# EAGLE board ninja star (EAGLE 9.5.2)
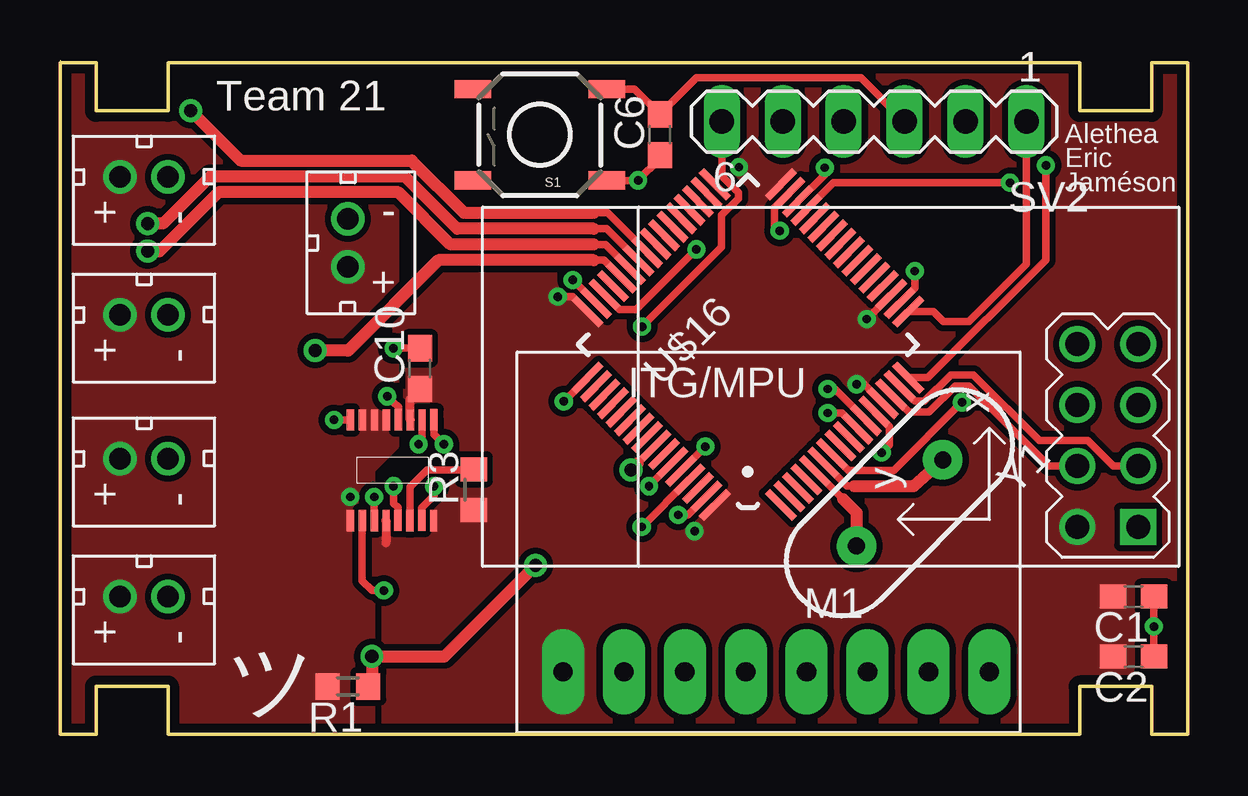
[diagram p0: board, top side]
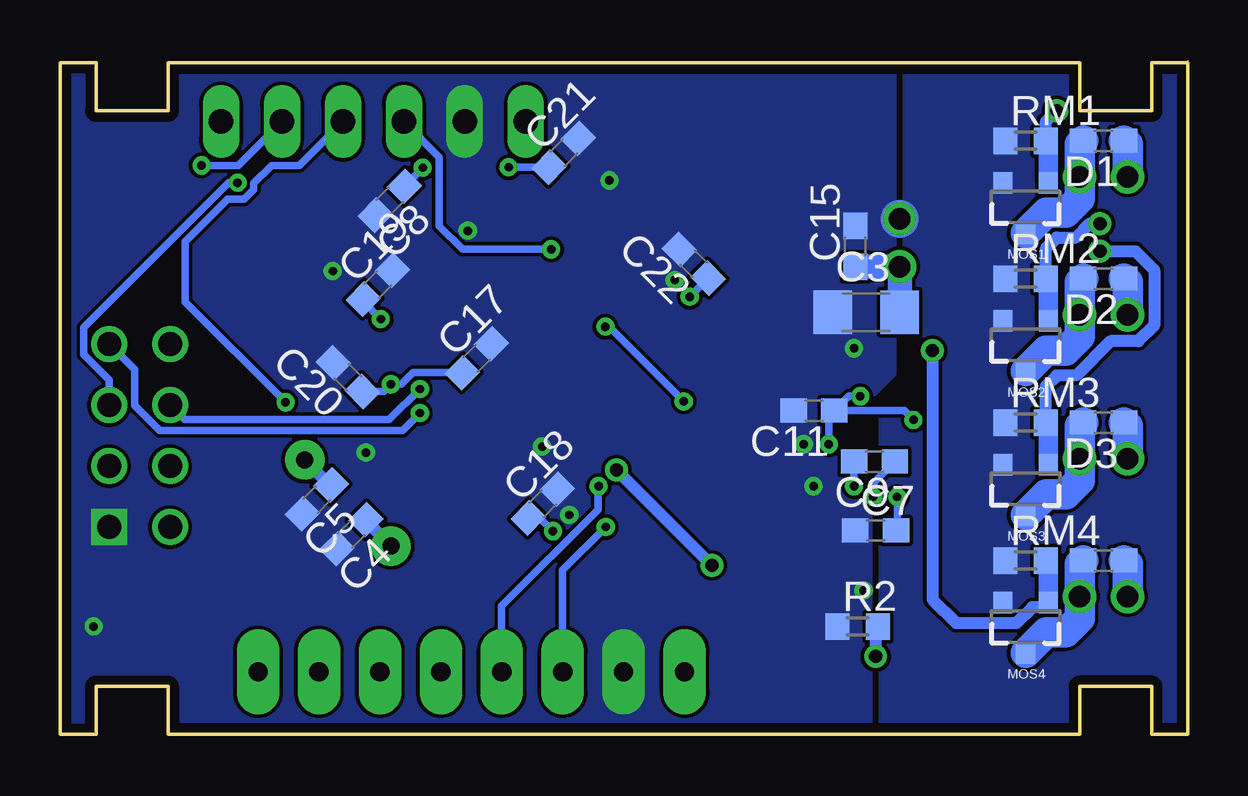
[diagram p1: board, bottom side, seen from below]

Size 47 x 28.12 mm. Coordinates in mm from the lower left corner, seen from the top.
Outline: 45.5,0 46.61,0
Outline: 0,28.12 0,28
Outline: 45.5,0 45.5,2 42.5,2 42.5,0 4.5,0 4.5,2 1.5,2 1.5,0 0,0 0,28
Outline: 0,28 1.5,28 1.5,26 4.5,26 4.5,28 42.5,28 42.5,26 45.5,26 45.5,28 47,28 47,0 45.5,0
Copper layers (1*16): Top 0.035mm / dielectric 1.5mm / Bottom 0.035mm
Design rules "default *": minimum track width 6mil, minimum drill 0.35mm, track to track 6mil, track to pad 6mil, pad to pad 6mil, via to via 6mil, smd to smd 6mil, copper to edge 15mil, drill to drill 6mil, minimum pad ring 10mil, minimum via ring 8mil, stop-mask expansion 4mil, vias tented up to drill 0mil, thermal gap 10mil

## Footprints (pad centres in the part's own frame; a part is rotated, then mirrored left to right if it is on the bottom)
C0603 = smd 1.1 x 1: 1 -0.85,0; 2 0.85,0
C1206 = smd 1.6 x 1.8: 1 -1.4,0; 2 1.4,0
WIRELESS-NRF24L01 = drill 1 square: 1 -12.7,6.35 | drill 1: 2 -10.16,6.35; 3 -12.7,3.81; 4 -10.16,3.81; 5 -12.7,1.27; 6 -10.16,1.27; 7 -12.7,-1.27; 8 -10.16,-1.27
SOT23-3 = smd 0.8 x 0.9: 1 -0.95,-1; 2 0.95,-1; 3 0,1.1
JST_CONNECTOR_FEMALE = drill 0.889: + 0,1; - 0,-1
R0603 = smd 1 x 1.1: 1 -0.85,0; 2 0.85,0
TACTILE-SWITCH-SMD = smd 1.524 x 0.762: 1 -2.794,1.905; 2 2.794,1.905; 3 -2.794,-1.905; 4 2.794,-1.905
MA06-1 = drill 1.016 long: 1 -6.35,0; 2 -3.81,0; 3 -1.27,0; 4 1.27,0; 5 3.81,0; 6 6.35,0
GY-521 = drill 0.8 pad 1.778 long: ADO -8.89,-6.35; GND -8.89,6.35; INT -8.89,-8.89; SCL -8.89,3.81; SDA -8.89,1.27; VCC -8.89,8.89; XCL -8.89,-3.81; XDA -8.89,-1.27
MSOP-16 = smd 0.889 x 0.305: P$1 2.082,-0.902; P$2 2.081,0.087; P$3 2.081,1.078; P$4 -2.115,1.589; P$5 2.081,-1.397; P$6 -2.115,0.104; P$7 -2.111,-0.393; P$8 -2.111,-1.393; P$9 -2.111,1.096; P$10 -2.111,0.599; P$11 2.085,0.587; P$12 -2.112,-1.895; P$13 2.086,-1.897; P$14 2.082,1.574; P$15 2.081,-0.408; P$16 -2.111,-0.889
LQFP64 = smd 0.3 x 1.6: 1 -3.75,-5.7; 2 -3.25,-5.7; 3 -2.75,-5.7; 4 -2.25,-5.7; 5 -1.75,-5.7; 6 -1.25,-5.7; 7 -0.75,-5.7; 8 -0.25,-5.7; 9 0.25,-5.7; 10 0.75,-5.7; 11 1.25,-5.7; 12 1.75,-5.7; 13 2.25,-5.7; 14 2.75,-5.7; 15 3.25,-5.7; 16 3.75,-5.7; 33 3.75,5.7; 34 3.25,5.7; 35 2.75,5.7; 36 2.25,5.7; 37 1.75,5.7; 38 1.25,5.7; 39 0.75,5.7; 40 0.25,5.7; 41 -0.25,5.7; 42 -0.75,5.7; 43 -1.25,5.7; 44 -1.75,5.7; 45 -2.25,5.7; 46 -2.75,5.7; 47 -3.25,5.7; 48 -3.75,5.7 | smd 1.6 x 0.3: 17 5.7,-3.75; 18 5.7,-3.25; 19 5.7,-2.75; 20 5.7,-2.25; 21 5.7,-1.75; 22 5.7,-1.25; 23 5.7,-0.75; 24 5.7,-0.25; 25 5.7,0.25; 26 5.7,0.75; 27 5.7,1.25; 28 5.7,1.75; 29 5.7,2.25; 30 5.7,2.75; 31 5.7,3.25; 32 5.7,3.75; 49 -5.7,3.75; 50 -5.7,3.25; 51 -5.7,2.75; 52 -5.7,2.25; 53 -5.7,1.75; 54 -5.7,1.25; 55 -5.7,0.75; 56 -5.7,0.25; 57 -5.7,-0.25; 58 -5.7,-0.75; 59 -5.7,-1.25; 60 -5.7,-1.75; 61 -5.7,-2.25; 62 -5.7,-2.75; 63 -5.7,-3.25; 64 -5.7,-3.75
HC49US = drill 0.7 pad 1.651: 1 -2.54,0; 2 2.54,0

## Placement (x,y rotation side)
C1  100nF  [C0603]  44.75,5.75 180 top
C2  10uF  [C0603]  44.75,3.25 180 top
C3  100uF  [C1206]  13.4,17.6 0 bottom
C4  16pF  [C0603]  34.85,8.35 225 bottom
C5  16pF  [C0603]  36.3,9.8 225 bottom
C6  0.1uF  [C0603]  25,25 90 top
C7  10uF  [C0603]  13,8.5 0 bottom
C8  4.7uF  [C0603]  33.25,22.25 225 bottom
C9  2.2uF  [C0603]  13.05,11.38 180 bottom
C10  22uF  [C0603]  15,15.25 90 top
C11  10uF  [C0603]  15.57,13.5 180 bottom
C15  1uF  [C0603]  13.85,20.35 90 bottom
C17  4.7uF  [C0603]  29.62,15.68 45 bottom
C18  100nF  [C0603]  26.88,9.62 45 bottom
C19  100nF  [C0603]  33.75,18.75 45 bottom
C20  100nF  [C0603]  35,14.9 135 bottom
C21  100nF  [C0603]  26,24.25 45 bottom
C22  100nF  [C0603]  20.58,19.62 135 bottom
D1  DIODE  [C0603]  3.5,24.75 180 bottom
D2  DIODE  [C0603]  3.5,19 180 bottom
D3  DIODE  [C0603]  3.5,13 180 bottom
D4  DIODE  [C0603]  3.5,7.25 180 bottom
M1  WIRELESS-NRF24L01  [WIRELESS-NRF24L01]  32.25,15 180 top
MOS1  N-CHANNEL-MOSFET-IRLML6244TRPBF  [SOT23-3]  6.75,22 180 bottom
MOS2  N-CHANNEL-MOSFET-IRLML6244TRPBF  [SOT23-3]  6.75,16.25 180 bottom
MOS3  N-CHANNEL-MOSFET-IRLML6244TRPBF  [SOT23-3]  6.75,10.25 180 bottom
MOS4  N-CHANNEL-MOSFET-IRLML6244TRPBF  [SOT23-3]  6.75,4.5 180 bottom
MOTOR1  JST_CONNECTOR_FEMALE  [JST_CONNECTOR_FEMALE]  3.5,23.25 90 top
MOTOR2  JST_CONNECTOR_FEMALE  [JST_CONNECTOR_FEMALE]  3.5,17.5 90 top
MOTOR3  JST_CONNECTOR_FEMALE  [JST_CONNECTOR_FEMALE]  3.5,11.5 90 top
MOTOR4  JST_CONNECTOR_FEMALE  [JST_CONNECTOR_FEMALE]  3.5,5.75 90 top
R1  10kΩ  [R0603]  12,2 180 top
R2  10kΩ  [R0603]  13.75,4.5 0 bottom
R3  500k  [R0603]  17.25,10.2 90 top
RM1  10kΩ  [R0603]  6.75,24.75 0 bottom
RM2  10kΩ  [R0603]  6.75,19 0 bottom
RM3  10kΩ  [R0603]  6.75,13 0 bottom
RM4  10kΩ  [R0603]  6.75,7.25 0 bottom
S1  SWITCH-MOMENTARY-2SMD  [TACTILE-SWITCH-SMD]  20,25 180 top
SV2  [MA06-1]  33.94,25.55 180 top
U1  GY-521MPU6050  [GY-521]  29.85,11.5 90 top
U$7  JST_CONNECTOR_FEMALE  [JST_CONNECTOR_FEMALE]  12,20.5 180 top
U$12  VR-LTC3246  [MSOP-16]  14,11 270 top
U$16  STM32F411XC  [LQFP64]  28.68,16.25 45 top
Y1  [HC49US]  35,9.65 225 top

## Library data of the parts
C1-C11 C15 C17-C22 = rcl; SPICEPREFIX: C
D1-D4 RM1-RM4 U$12 Y1 = AP_quad_updated
M1 MOTOR1-MOTOR4 U1 U$7 = Aircopter_quad_lib
MOS1-MOS4 = Aircopter_quad_lib; DATASHEET: http://www.mouser.com/ds/2/196/irlml6244pbf-936666.pdf; MOUSER: 942-IRLML6244TRPBF; URL: http://www.mouser.com/Search/ProductDetail.aspx?R=IRLML6244TRPBFvirtualkey57370000virtualkey942-IRLML6244TRPBF
R1 R2 = rcl; SPICEPREFIX: R
R3 = AP_quad
S1 = Aircopter_quad_lib; PROD_ID: SWCH-08247
SV2 = con-lstb; OC_FARNELL: unknown; OC_NEWARK: unknown
U$16 = Aircopter_quad_lib (1)

## Nets
3.3V: C1.2 C2.2 C10.1 C17.1 C18.1 C19.1 C20.1 C21.1 C22.1 M1.2 R3.1 U1.VCC U$12.P$10 U$12.P$14 U$12.P$15 U$16.13 U$16.19 U$16.32 U$16.48 U$16.64
ANALOG: R1.1 R2.2 U$16.57
CAP: C9.2 U$12.P$2
CE: M1.3 U$16.15
CSN: M1.4 U$16.14
GND: C1.1 C2.1 C3.1 C4.2 C5.2 C6.1 C7.1 C8.2 C10.2 C11.2 C15.2 C17.2 C18.2 C19.2 C20.2 C21.2 C22.2 M1.1 MOS1.2 MOS2.2 MOS3.2 MOS4.2 R2.1 RM1.1 RM2.1 RM3.1 RM4.1 S1.1 SV2.5 U1.GND U$7.- U$12.P$3 U$12.P$4 U$12.P$5 U$16.12 U$16.18 U$16.31 U$16.47 U$16.60 U$16.63
MISO: M1.7 U$16.10
MOSI: M1.6 U$16.11
N$1: C9.1 U$12.P$1
N$2: D2.2 MOS2.3 MOTOR2.-
N$3: D1.2 MOS1.3 MOTOR1.-
N$4: D3.2 MOS3.3 MOTOR3.-
N$5: D4.2 MOS4.3 MOTOR4.-
N$6: R3.2 U$12.P$11
N$7: C8.1 U$16.30
N$11: C11.1 U$12.P$6 U$12.P$9 U$12.P$12
OSC_IN: C4.1 U$16.5 Y1.2
OSC_OUT: C5.1 U$16.6 Y1.1
RESET: C6.2 S1.3 SV2.3 U$16.7
RX: SV2.1 U$16.17
SCK: M1.5 U$16.29
SCL: U1.SCL U$16.61
SDA: U1.SDA U$16.59
SWCLK: SV2.6 U$16.49
SWDIO: SV2.4 U$16.46
TIM1: MOS1.1 RM1.2 U$16.41
TIM2: MOS2.1 RM2.2 U$16.42
TIM3: MOS3.1 RM3.2 U$16.43
TIM4: MOS4.1 RM4.2 U$16.44
TX: SV2.2 U$16.16
VBAT: C3.2 C7.2 C15.1 D1.1 D2.1 D3.1 D4.1 MOTOR1.+ MOTOR2.+ MOTOR3.+ MOTOR4.+ R1.2 U$7.+ U$12.P$7 U$12.P$8 U$12.P$13 U$12.P$16

## Tracks (layer width: path | path; a pad name or v marks a point on that pad's centre or on a via)
3.3V  (via drill 0.35)
  Top 0.305: v20.75,18.25 21.37,18.25 U$16.48 | v33.63,17.32 U$16.19 | v33.21,14.6 33.51,14.6 U$16.13
  Top 0.375: U$12.P$15 13.59,8 | U$12.P$10 14.6,14
  Bottom 0.305: v33.63,17.32 34.35,18.04 C19.1 | C21.1 v28.3,23.65 | v26.45,8.47 27,9.02 C18.1 | C22.1 v20.75,18.25 | C20.1 33.51,14.3 v33.21,14.6 32.77,14.6 32.28,15.08 C17.1
  pour Top (isolate 0.254, rank 2, no thermals): 13,0 13,11 14,12 14,28 42.5,28 42.5,26 45.5,26 45.5,28 47,28 47,0 45.5,0 45.5,2 42.5,2 42.5,0
ANALOG  (via drill 0.55)
  Top 0.305: U$16.57 24.08,11.3 24.07,11.3
  Top 0.508: 24.07,11.3 v23.8,11.03 | R1.1 13,2.15 v13,3.25 16.02,3.25 v19.82,7.05
  Bottom 0.508: v19.82,7.05 v23.8,11.03 | v13,3.25 13,4.4 R2.2
CAP  (via drill 0.35)
  Top 0.305: U$12.P$2 14.09,9.46 13.9,9.64 v13.9,10.35
  Bottom 0.305: v13.9,10.35 C9.2
CE
  Top 0.305: M1.3 43.91,11.19 42.85,12.25 40.81,12.25 38.07,14.99 37.13,14.99 36.03,13.89 35.63,13.89 U$16.15
CSN
  Top 0.305: U$16.14 35.38,13.43 36.22,13.43 37.32,14.53 37.88,14.53 38.21,14.21 38.28,14.13 41.23,11.19 M1.4
GND  (via drill 0.35)
  Top 0.305: U$12.P$5 12.6,6.4 13,6 v13.5,6 | U$12.P$3 15.08,9.45 15.59,9.96 v15.59,10.35 | U$16.63 26.17,9.15 v25.77,9.15 | S1.1 v24.09,23.09 v24.1,23.1 25,24 C6.1 | U$16.47 v21.38,18.95 | U$16.60 v26.9,12 | U$16.31 29.78,21.96 29.78,21.22 v30,21 | U$12.P$4 15.59,12.51 v16,12.1 | v35.63,19.32 35.63,18.61 U$16.18 | C1.1 v45.6,4.5 C2.1 | v13.9,16.1 C10.2 | U$16.12 34.57,12.83 34.57,12.07 v34.25,11.75
  Bottom 1.587: U$7.-
  pour Bottom (no thermals): 0,28 0,0 1.5,0 1.5,2 4.5,2 4.5,0 12.8,0 12.8,14 11.8,15 11.8,28 4.5,28 4.5,26 1.5,26 1.5,28
  pour Bottom (no thermals): 13.2,0 13.2,14 12.2,15 12.2,28 42.5,28 42.5,26 45.5,26 45.5,28 47,28 47,0 45.5,0 45.5,2 42.5,2 42.5,0
MISO  (via drill 0.35)
  Top 0.305: v32,13.4 32.59,13.4 U$16.10
  Bottom 0.305: M1.7 43.89,15.21 43.89,13.71 42.85,12.67 32.73,12.67 v32,13.4
MOSI  (via drill 0.35)
  Top 0.305: U$16.11 32.29,14.4 v32,14.4
  Bottom 0.305: M1.6 41.81,13.13 33.27,13.13 v32,14.4
N$1  (via drill 0.35)
  Top 0.305: U$12.P$1 v13.1,9.9
  Bottom 0.305: v13.1,9.9 13.1,10.48 C9.1
N$2
  Bottom 1.27: D2.2 4.5,18.85 MOTOR2.- 4.5,16.59 5.07,16.01 5.89,16.01 MOS2.3
N$3
  Bottom 1.27: D1.2 4.5,24.6 MOTOR1.- 4.5,22.34 5.07,21.76 5.89,21.76 MOS1.3
N$4
  Bottom 1.27: MOS3.3 5.89,10.01 5.07,10.01 4.5,10.59 MOTOR3.- 4.5,12.85 D3.2
N$5
  Bottom 1.27: MOS4.3 5.89,4.26 5.07,4.26 4.5,4.84 MOTOR4.- 4.5,7.1 D4.2
N$6
  Top 0.305: R3.2 17.23,11.03 15.31,11.03 14.59,10.31 U$12.P$11
N$7  (via drill 0.35)
  Top 0.305: U$16.30 31.88,23.34 v31.88,23.63
  Bottom 0.305: C8.1 v31.88,23.62 v31.88,23.63
N$11  (via drill 0.35)
  Top 0.305: v11.42,13.11 U$12.P$12 | v13.64,14.1 13.88,13.86 13.89,13.86 14.1,13.64 U$12.P$6 | U$12.P$9 15.1,12.25 v14.95,12.1
  Bottom 0.305: v14.95,12.1 14.95,13.28 C11.1 | v13.64,14.1 14.12,14.1 C11.1 | C11.1 11.81,13.5 v11.42,13.11
OSC_IN
  Top 0.305: U$16.5 32.65,9.8
  Top 0.508: 32.65,9.8 33.2,9.25 Y1.2
  Bottom 0.508: Y1.2 34.25,8.9 C4.1
OSC_OUT
  Top 0.305: U$16.6 32.8,10.36 33,10.36 33.1,10.36
  Top 0.508: 33.1,10.36 35.59,10.36 Y1.1
  Bottom 0.508: Y1.1 35.75,10.4 C5.1
RESET  (via drill 0.35)
  Top 0.305: S1.3 23.95,26.91 C6.2 26.53,27.38 33.38,27.38 SV2.3 | U$16.7 32.86,11 34.75,11 v37.6,13.85
  Bottom 0.305: SV2.3 37.03,23.72 38.18,23.72 38.92,22.98 38.92,22.72 39.32,22.32 40.01,22.32 41.79,20.54 41.79,18.04 v37.6,13.85
RX
  Top 0.305: U$16.17 36.41,17.63 36.82,17.22 37.88,17.22 40.29,19.62 SV2.1
SCK  (via drill 0.35)
  Top 0.305: U$16.29 32.24,23 v39.6,23
  Bottom 0.305: M1.5 44.95,14.77 46.01,15.83 46.01,16.97 39.98,23 v39.6,23
SCL  (via drill 0.35)
  Top 0.305: v24.25,8.65 26.23,10.63 U$16.61
  Bottom 0.305: v24.25,8.65 26.04,6.86 U1.SCL
SDA  (via drill 0.35)
  Top 0.305: v24.55,10.35 v24.55,10.36 U$16.59
  Bottom 0.305: v24.55,10.35 24.57,10.33 24.57,9.37 28.58,5.35 U1.SDA
SWCLK  (via drill 0.35)
  Top 0.305: SV2.6 27.59,23.29 28.27,22.6 28.27,22.35 27.57,21.65 27.57,20.31 v24.27,17 | v21,13.88 U$16.49
  Bottom 0.305: v21,13.88 24.11,17 v24.27,17
SWDIO  (via drill 0.35)
  Top 0.305: U$16.46 23.32,17.71 24.01,17.71 v26.52,20.23
  Bottom 0.305: v26.52,20.23 30.23,20.23 31.19,21.19 31.19,24.08 SV2.4
TIM1  (via drill 0.55)
  Top 0.305: 22.25,21.75 22.82,21.75 U$16.41
  Top 0.508: 22.25,21.75 16.84,21.75 14.66,23.93 7.52,23.93 v5.45,26
  Bottom 0.508: RM1.2 5.9,25.55 v5.45,26
  Bottom 0.813: MOS1.1 5.8,24.65 RM1.2
TIM2  (via drill 0.55)
  Top 0.305: 22.25,21.09 22.78,21.09 U$16.42
  Top 0.508: 22.25,21.09 16.56,21.09 14.38,23.27 13,23.27 6.26,23.27 4.3,21.3 v3.65,21.3
  Bottom 0.508: RM2.2 5.9,20.28 5.46,20.72 4.64,20.72 4.06,21.3 v3.65,21.3
  Bottom 0.813: MOS2.1 5.8,18.9 RM2.2
TIM3  (via drill 0.55)
  Top 0.305: U$16.43 22.73,20.43 22.25,20.43
  Top 0.508: 22.25,20.43 16.29,20.43 14.11,22.61 6.61,22.61 4.15,20.15 v3.65,20.15
  Bottom 0.508: RM3.2 5.9,14.53 5.46,14.97 4.64,14.97 3.22,16.39 2.04,16.39 1.4,17.04 1.4,19.37 2.17,20.15 v3.65,20.15
  Bottom 0.813: MOS3.1 5.8,12.9 RM3.2
TIM4  (via drill 0.55)
  Top 0.305: U$16.44 22.68,19.77 22.25,19.77
  Top 0.508: 22.25,19.77 15.77,19.77 12,16 v10.63,16
  Bottom 0.508: MOS4.1 6,5.3 6.47,5.3 7.13,4.64 9.64,4.64 10.63,5.63 v10.63,16
  Bottom 0.813: MOS4.1 5.8,7.15 RM4.2
TX  (via drill 0.35)
  Top 0.305: v41.1,23.72 41.1,19.79 36.19,14.87 U$16.16
  Bottom 0.305: SV2.2 39.58,23.72 v41.1,23.72
VBAT  (via drill 0.35)
  Bottom 0.305: v12.1,9.9 12.1,8.55 C7.2
  Bottom 1.016: C3.2 U$7.+ C15.1
  Bottom 1.27: MOTOR1.+ 2.5,24.6 D1.1 | MOTOR3.+ 2.5,12.85 D3.1 | MOTOR4.+ 2.5,7.1 D4.1 | MOTOR2.+ 2.5,18.85 D2.1
  pour Top (isolate 0.254, no thermals): 0,0 0,28 1.5,28 1.5,26 4.5,26 4.5,28 14,28 14,12 13,11 13,0 4.5,0 4.5,2 1.5,2 1.5,0

## Text on the board
tPlace: Team 21 | Alethea / Eric / Jaméson | 👌 | ツ